# EAGLE board analog1 (EAGLE 6.6.0)
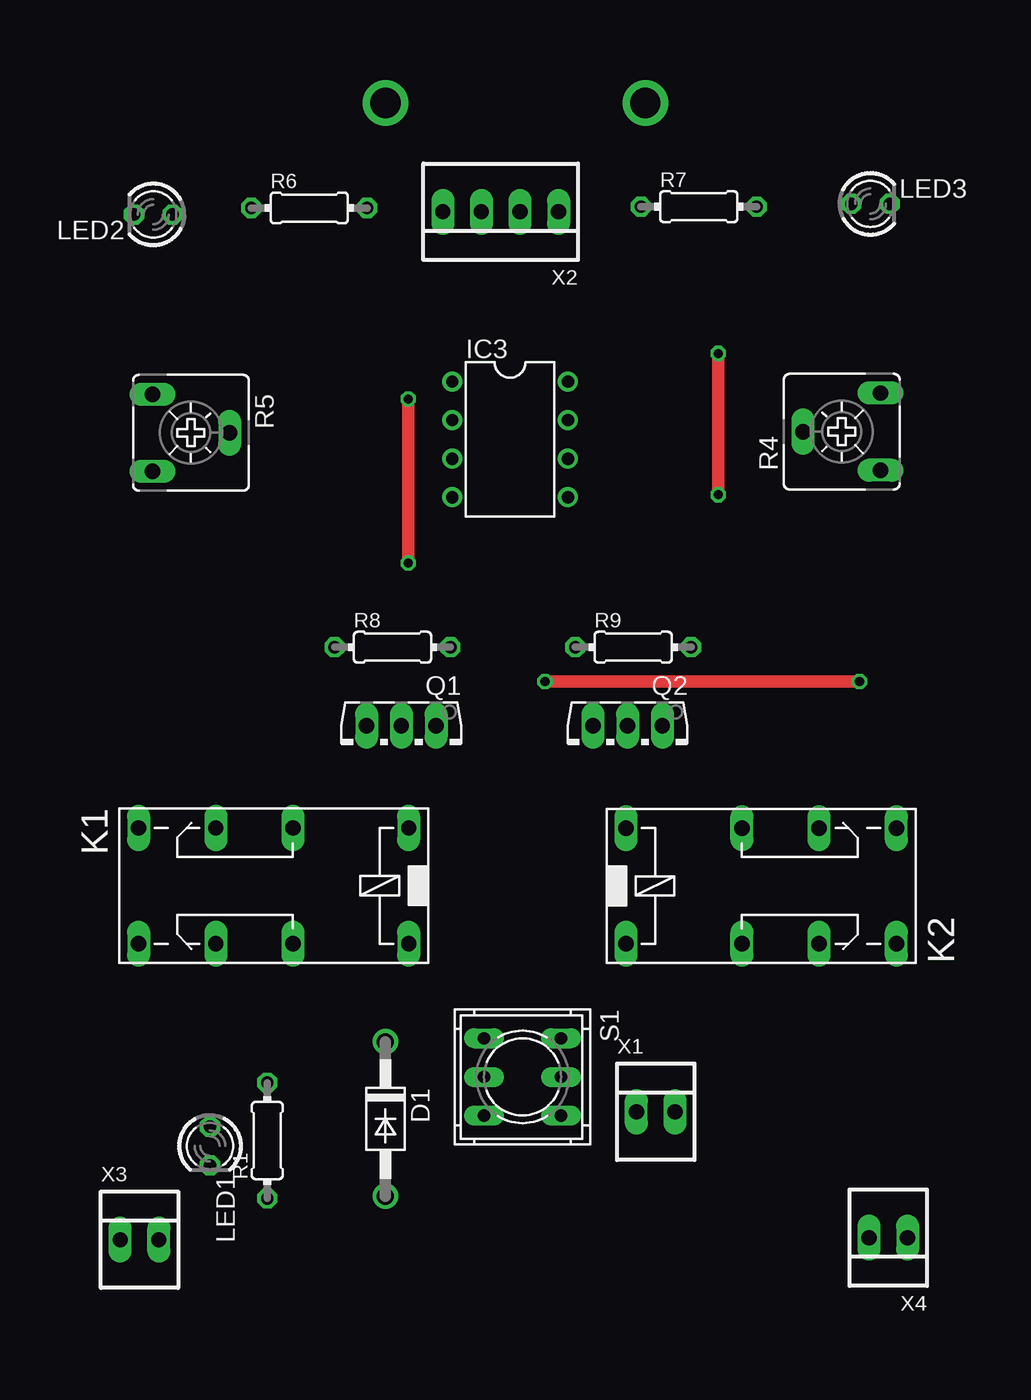
[diagram p0: board, top side]
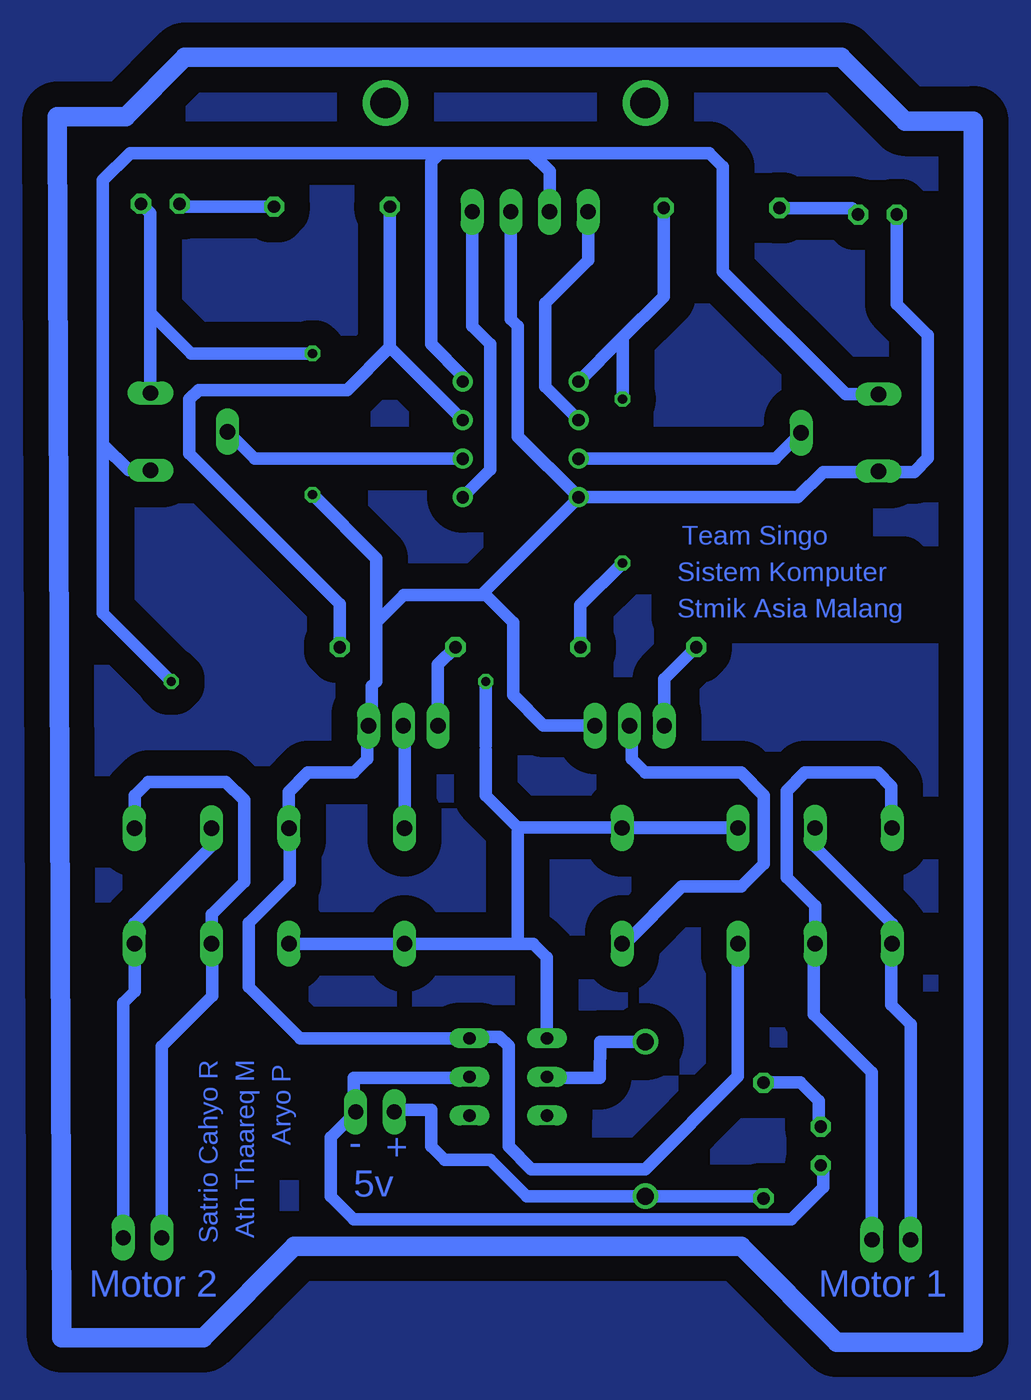
[diagram p1: board, bottom side, seen from below]

No outline drawn. Coordinates in mm, seen from the top.
Copper layers (1*16): Top 0.035mm / dielectric 1.5mm / Bottom 0.035mm
Design rules "default": minimum track width 10mil, minimum drill 24mil, track to track 8mil, track to pad 8mil, pad to pad 8mil, via to via 8mil, smd to smd 8mil, copper to edge 40mil, drill to drill 8mil, minimum pad ring 10mil, minimum via ring 8mil, stop-mask expansion 4mil, vias tented up to drill 0mil, thermal gap 10mil

## Footprints (pad centres in the part's own frame; a part is rotated, then mirrored left to right if it is on the bottom)
DO41-10 = drill 1.118: A 5.08,0; C -5.08,0
DIL08 = drill 0.813 pad 1.27: 1 -3.81,-3.81; 2 -1.27,-3.81; 3 1.27,-3.81; 4 3.81,-3.81; 5 3.81,3.81; 6 1.27,3.81; 7 -1.27,3.81; 8 -3.81,3.81
351 = drill 1.016 long: 1 -3.81,-3.81; 16 -3.81,3.81; O1 8.89,-3.81; O2 8.89,3.81; P1 3.81,-3.81; P2 3.81,3.81; S1 13.97,-3.81; S2 13.97,3.81
LED3MM = drill 0.813 octagon: A -1.27,0; K 1.27,0
TO126AV = drill 1.016 long: B 2.286,-1.27; C 0,-1.27; E -2.286,-1.27
0204/7 = drill 0.813 octagon: 1 -3.81,0; 2 3.81,0
CA6V = drill 1.016 long: A -2.54,-2.54; E 2.54,-2.54; S 0,2.54
9077-2 = drill 0.813 long: 1 -2.54,2.54; 2 0,2.54; 3 2.54,2.54; 4 -2.54,-2.54; 5 0,-2.54; 6 2.54,-2.54
22-23-2021 = drill 1 long: 1 -1.27,0; 2 1.27,0
22-23-2041 = drill 1 long: 1 -3.81,0; 2 -1.27,0; 3 1.27,0; 4 3.81,0

## Placement (x,y rotation side)
D1  1N4004  [DO41-10]  57.6,9.6 270 top
IC3  LM358N  [DIL08]  65.8,54.34 270 top
K1  351  [351]  55.32,24.95 180 top
K2  351  [351]  77.25,24.94 0 top
LED1  [LED3MM]  46.05,7.82 270 top
LED2  [LED3MM]  42.32,69.15 180 top
LED3  [LED3MM]  89.52,69.85 0 top
Q1  BD139  [TO126AV]  58.64,34.23 180 top
Q2  BD139  [TO126AV]  73.53,34.23 180 top
R1  [0204/7]  49.82,8.18 90 top
R4  [CA6V]  87.63,54.85 90 top
R5  [CA6V]  44.8,54.78 270 top
R6  [0204/7]  52.58,69.58 0 top
R7  [0204/7]  78.22,69.66 0 top
R8  [0204/7]  58.06,40.66 0 top
R9  [0204/7]  73.9,40.66 0 top
S1  9077-2  [9077-2]  66.62,12.37 270 top
X1  22-23-2021  [22-23-2021]  75.39,10.07 0 top
X2  22-23-2041  [22-23-2041]  65.18,69.33 180 top
X3  22-23-2021  [22-23-2021]  41.41,1.65 0 top
X4  22-23-2021  [22-23-2021]  90.69,1.78 180 top

## Library data of the parts
D1 = diode
IC3 = linear
K1 K2 = relay; OC_FARNELL: unknown; OC_NEWARK: unknown
LED1-LED3 = led
Q1 Q2 = transistor-power
R1 R6-R9 = resistor
R4 R5 = pot
S1 = switch-misc
X1 X3 X4 = con-molex; MF: MOLEX; MPN: 22-23-2021; OC_FARNELL: 1462926; OC_NEWARK: 25C3832
X2 = con-molex; MF: MOLEX; MPN: 22-23-2041; OC_FARNELL: 1462920; OC_NEWARK: 38C0355

## Nets
GNDA: IC3.4 K1.P2 K2.P2 LED2.K LED3.K Q1.E Q2.E R4.E R5.E S1.1 X2.2
N$3: D1.C S1.5
N$8: K2.O1 K2.S2 X4.2
N$12: IC3.2 X2.4
N$13: IC3.5 X2.1
N$14: IC3.3 R5.S
N$15: IC3.6 R4.S
N$16: IC3.1 R6.2 R8.2
N$17: LED2.A R6.1
N$18: LED3.A R7.2
N$19: IC3.7 R7.1 R9.2
N$21: Q2.B R9.1
N$22: Q1.B R8.1
N$25: K1.16 Q1.C
N$26: K2.16 Q2.C
N$29: K2.O2 K2.S1 X4.1
N$32: K1.O2 K1.S1 X3.2
N$33: K1.O1 K1.S2 X3.1
S$7: K1.1 K1.P1
S$8: K2.1 K2.P1 S1.4
VCC: IC3.8 R4.A R5.A X2.3

## Tracks (layer width: path | path; a pad name or v marks a point on that pad's centre or on a via)
GNDA  (via drill 0.6)
  Top 0.813: v79.5,50.7 v79.5,60
  Bottom 0.813: R4.E 90.17,62.7 | 90.17,62.7 90.17,69.23 LED3.K | X2.2 66.45,62.25 66,61.8 66,54.54 IC3.4 | LED2.K 41.05,63.25 39,61.2 39,53.1 39.9,52.2 42.22,52.2 R5.E 42.3,52.2 45.9,52.2 47.57,50.53 IC3.4 | Q1.E 64.3,35.5 66.3,37.5 66.3,42.3 68.1,44.1 68.4,44.1 | 68.4,44.1 73.5,44.1 75.3,42.3 | 75.3,42.3 75.3,38.4 75.6,38.1 75.6,35.72 Q2.E 75.9,35.42 75.9,33.3 76.8,32.4 79.8,32.4 81.06,31.14 K2.P2 81,28.69 81,25.2 83.7,22.5 83.7,18.3 80.31,14.91 S1.1 69.07,15 67.2,15 66.6,14.4 66.6,7.8 65.1,6.3 57.6,6.3 51.51,12.39 K1.P2 | IC3.4 61.99,50.51 68.4,44.1 | 75.3,42.3 75.3,46.5 v79.5,50.7 | v79.5,60 87.47,60 90.17,62.7
N$3
  Bottom 0.813: D1.C 60.58,14.68 60.6,12.3 64.01,12.3 S1.5
N$8
  Bottom 0.813: X4.2 89.42,14.38 86.1,17.7 86.1,21.09 K2.O1 86.14,23.06 84,25.2 84,30.6 85.2,31.8 90.3,31.8 91.2,30.9 91.2,28.77 K2.S2
N$12
  Bottom 0.813: X2.4 61.37,66.13 64.2,63.3 64.2,57.82 IC3.2
N$13
  Bottom 0.813: X2.1 68.99,61.79 67.8,60.6 67.8,52.34 IC3.5
N$14
  Bottom 0.813: IC3.3 49.05,53.07 R5.S
N$15
  Bottom 0.813: IC3.6 83.31,53.07 R4.S
N$16  (via drill 0.6)
  Top 0.813: v59.1,46.2 v59.1,57
  Bottom 0.813: R6.2 56.39,63.75 59.17,60.97 | 59.17,60.97 IC3.1 | R8.2 61.87,43.43 v59.1,46.2 | v59.1,57 59.1,60.9 59.17,60.97
N$17
  Bottom 0.813: R6.1 44.02,69.58 LED2.A
N$18
  Bottom 0.813: R7.2 88.06,69.66 LED3.A
N$19
  Bottom 0.813: R7.1 74.41,60.41 | 74.41,60.41 IC3.7 | R9.2 77.71,43.51 87.6,53.4 87.6,57 87,57.6 77.22,57.6 74.41,60.41
N$20
  Bottom 1.27: 36.3,-5.1 45,-5.1 51.3,1.2 80.7,1.2 86.7,-4.8 96,-4.8 96.3,75.6 91.8,75.6 87.9,79.5 44.7,79.5 40.5,75.3 36,75.3 36,-5
N$21
  Bottom 0.813: Q2.B 71.24,39.51 R9.1
N$22
  Bottom 0.813: Q1.B 56.35,38.56 R8.1
N$25
  Bottom 0.813: K1.16 58.96,21.14 55.2,24.9 51.3,24.9 49.8,26.4 49.8,30.9 51.3,32.4 57.6,32.4 58.5,33.3 58.5,35.36 Q1.C
N$26
  Bottom 0.813: K2.16 73.44,35.41 Q2.C
N$29
  Bottom 0.813: X4.1 91.96,17.24 91.2,18 91.2,21.11 K2.S1 91.22,22.48 86.1,27.6 86.1,28.71 K2.O2
N$32
  Bottom 0.813: X3.2 42.68,12.68 46.5,16.5 46.5,21.07 K1.O2 46.43,23.63 48.3,25.5 48.3,31.2 47.1,32.4 42.3,32.4 41.4,31.5 41.4,28.81 K1.S1
N$33
  Bottom 0.813: X3.1 40.14,15.84 41.4,17.1 41.4,21.09 K1.S2 41.35,22.45 46.5,27.6 46.5,28.69 K1.O1
S$1
  Bottom 0.813: 74.1,10.2 71.7,10.2 71.7,7.8 70.8,6.9 67.8,6.9 65.4,4.5 49.8,4.5
S$2
  pour Bottom (isolate 1.676): 46.2,83.4 98.6,83.4 arc-90 101.1,80.9 101.1,-9.6 32.2,-9.6 arc-90 29.7,-7.1 29.7,83.4 45.6,83.4
S$3  (via drill 2)
  other vias: 57.6,76.5
S$4  (via drill 2)
  other vias: 74.7,76.5
S$6
  Bottom 0.813: 66,28.5 66,21.3
S$7
  Bottom 0.813: 68.1,33.9 68.1,30.9 66,28.8 51.55,28.8 K1.P1 K1.1 59.1,28.73
S$8
  Bottom 0.813: K2.P1 K2.1 64.99,21.13 64.08,20.22 S1.4
S$10
  Bottom 0.813: 50.1,12 47.4,12 46.2,10.8 46.2,9.3 45.9,9
S$11
  Bottom 0.813: 45.9,6.3 45.9,5.1 48,3 76.8,3 78.3,4.5 78.3,8.4 76.8,9.9 76.8,12.3 69,12.3
VCC  (via drill 0.6)
  Top 0.813: v68.1,38.4 v88.8,38.4
  Bottom 0.813: R4.A 91.61,52.31 93.3,54 | 93.3,54 93.3,71.4 91.5,73.2 71.1,73.2 | 71.1,73.2 65.1,73.2 | 65.1,73.2 63.9,72 X2.3 | IC3.8 69.61,58.51 71.7,60.6 71.7,72.6 71.1,73.2 | R5.A 44.42,57.32 52.5,65.4 52.5,72.3 53.4,73.2 65.1,73.2 | 68.1,34.2 v68.1,38.4 | v88.8,38.4 93.3,42.9 93.3,54

## Text on the board
Bottom: Team Singo | Sistem Komputer | Stmik Asia Malang | Ath Thaareq M | Satrio Cahyo R | Aryo P | + | - | 5v | Motor 1 | Motor 2